# EAGLE board Casa Inteligente (EAGLE 9.7.0)

Size 393.65 x 179.97 mm. Coordinates in mm from the lower left corner, seen from the top.
Outline: 0,0 393.65,0 393.65,179.97 0,179.97 0,0
Copper layers (1*16): Top 0.035mm / dielectric 1.5mm / Bottom 0.035mm
Design rules "default": minimum track width 6mil, minimum drill 0.35mm, track to track 6mil, track to pad 6mil, pad to pad 6mil, via to via 6mil, smd to smd 6mil, copper to edge 40mil, drill to drill 6mil, minimum pad ring 10mil, minimum via ring 8mil, stop-mask expansion 4mil, vias tented up to drill 0mil, thermal gap 10mil

## Footprints (pad centres in the part's own frame; a part is rotated, then mirrored left to right if it is on the bottom)
LEDRD254W60D565H860B_Y = drill 0.981 pad 1.581: 1 -1.27,0; 2 1.27,0
MQ-XX-SOCKET = drill 1.27: 1 -6.223,6.223; 2 -8.788,0; 3 -6.223,-6.223; 4 6.223,-6.223; 5 8.788,0; 6 6.223,6.223
KS2E-M-DC5 = drill 0.8: 1 -8.89,-3.81; 4 -1.27,-3.81; 6 3.81,-3.81; 8 8.89,-3.81; 9 8.89,3.81; 11 3.81,3.81; 13 -1.27,3.81; 16 -8.89,3.81
1X02 = drill 1.016 long: 1 -1.27,0; 2 1.27,0
BATTERY-GENERIC = drill 1.118 pad 3.15 octagon: + 2.54,0; - -2.54,0
PIEZO = drill 1 pad 1.6: 1 -3.5,0; 2 3.5,0
28027 = drill 1.016 long: 1 -2.54,0; 2 0,0; 3 2.54,0
GL5528 = drill 0.8 pad 1.4: 1 -1.702,0; 2 1.702,0
RESAD1016W63L850D250B = drill 0.83 pad 1.43: 1 -5.08,0; 2 5.08,0
SEN-13322 = drill 1.016 long: 1 -2.54,0; 2 0,0; 3 2.54,0
ARDUINO-UNO-R3-SHIELD = drill 1.016 pad 1.88: 3.3V 24.13,-2.54; 5V 24.13,0; A0 24.13,12.7; A1 24.13,15.24; A2 24.13,17.78; A3 24.13,20.32; A4 24.13,22.86; A5 24.13,25.4; AREF -24.13,-13.97; D2 -24.13,20.32; D3 -24.13,17.78; D4 -24.13,15.24; D5 -24.13,12.7; D6 -24.13,10.16; D7 -24.13,7.62; D8 -24.13,3.81; D9 -24.13,1.27; D10 -24.13,-1.27; D11 -24.13,-3.81; D12 -24.13,-6.35; D13 -24.13,-8.89; GND@0 24.13,2.54; GND@1 24.13,5.08; GND@2 -24.13,-11.43; IOREF 24.13,-7.62; NC 24.13,-10.16; RES 24.13,-5.08; RX -24.13,25.4; SCL -24.13,-19.05; SDA -24.13,-16.51; TX -24.13,22.86; VIN 24.13,7.62
TO92 = drill 0.813 octagon: 1 -1.27,0; 2 0,1.905; 3 1.27,0

## Placement (x,y rotation side)
DLED_AMARELO  YELLOW  [LEDRD254W60D565H860B_Y]  204.03,124.81 180 top
DLED_AMARELO1  YELLOW  [LEDRD254W60D565H860B_Y]  212.34,124.92 180 top
DLED_AMARELO2  YELLOW  [LEDRD254W60D565H860B_Y]  220.7,124.87 180 top
DLED_AMARELO3  YELLOW  [LEDRD254W60D565H860B_Y]  263.98,124.91 180 top
DLED_AMARELO4  YELLOW  [LEDRD254W60D565H860B_Y]  273.54,125.14 180 top
DLED_AMARELO5  YELLOW  [LEDRD254W60D565H860B_Y]  282.89,125.04 180 top
GASSENSOR_DE_GÁS  GAS-SENSORMQ-XX-SOCKET  [MQ-XX-SOCKET]  325.07,12.92 270 top
KRELE_AQUECEDOR  RELAY-DPDT_KS2E  [KS2E-M-DC5]  380.42,123.6 0 top
KRELE_BOMBA_D'_ÁGUA  RELAY-DPDT_KS2E  [KS2E-M-DC5]  153.5,122.68 0 top
LAQUECEDOR  LIGHTBULB  [1X02]  380.88,136.7 0 top
LBOMBA_D'_ÁGUA  LIGHTBULB  [1X02]  154.11,136.01 0 top
PFONTE_DC_/_12V_0.250A  BATTERYGENERIC  [BATTERY-GENERIC]  153.91,168.96 180 top
PFONTE_DC_/_12V_0.250A1  BATTERYGENERIC  [BATTERY-GENERIC]  380.24,171.71 180 top
PIEZOBUZZER  PIEZO  [PIEZO]  326.17,113.96 0 top
PIRSENSOR_DE_MOVIMENTO  PIR-SENSOR_28027  [28027]  271.25,12.77 180 top
RLDR  PHOTOCELL_GL5528  [GL5528]  210.79,9.18 180 top
RRESISTOR_4K_OHM  4k  [RESAD1016W63L850D250B]  212.14,22.16 90 top
RRESISTOR_100K_OHM  100k  [RESAD1016W63L850D250B]  319.82,108.88 90 top
RRESISTOR_220_OHM  220  [RESAD1016W63L850D250B]  284.16,119.96 90 top
RRESISTOR_220_OHM1  220  [RESAD1016W63L850D250B]  274.81,120.06 90 top
RRESISTOR_220_OHM2  220  [RESAD1016W63L850D250B]  265.25,119.83 90 top
RRESISTOR_220_OHM3  220  [RESAD1016W63L850D250B]  221.97,119.79 90 top
RRESISTOR_220_OHM4  220  [RESAD1016W63L850D250B]  213.61,119.84 90 top
RRESISTOR_220_OHM5  220  [RESAD1016W63L850D250B]  205.3,119.73 90 top
RRESISTOR_800_OHM  800  [RESAD1016W63L850D250B]  319.99,29.43 270 top
SENSENSOR_DE_UMIDADE_DO_SOLO  SEN-13322  [SEN-13322]  152.71,26.47 0 top
U1  ARDUINO-UNO-R3-SHIELD  [ARDUINO-UNO-R3-SHIELD]  29.84,99.93 180 top
USENSOR_DE_TEMPERATURA  TMP36GT9Z_TO92  [TO92]  380.15,14.33 0 top

## Library data of the parts
DLED_AMARELO DLED_AMARELO1-DLED_AMARELO5 = Tinkercad; CATEGORY: Opto-Electronic; SUB-CATEGORY: LED; VALUE: LED_YELLOW
GASSENSOR_DE_GÁS KRELE_AQUECEDOR KRELE_BOMBA_D'_ÁGUA LAQUECEDOR LBOMBA_D'_ÁGUA PFONTE_DC_/_12V_0.250A PFONTE_DC_/_12V_0.250A1 PIEZOBUZZER PIRSENSOR_DE_MOVIMENTO RLDR RRESISTOR_4K_OHM RRESISTOR_100K_OHM RRESISTOR_220_OHM RRESISTOR_220_OHM1-RRESISTOR_220_OHM5 RRESISTOR_800_OHM SENSENSOR_DE_UMIDADE_DO_SOLO U1 USENSOR_DE_TEMPERATURA = Tinkercad

## Nets
DLED_AMARELO1_A: DLED_AMARELO1.1 RRESISTOR_220_OHM4.2
DLED_AMARELO2_A: DLED_AMARELO2.1 RRESISTOR_220_OHM3.2
DLED_AMARELO3_A: DLED_AMARELO3.1 RRESISTOR_220_OHM2.2
DLED_AMARELO4_A: DLED_AMARELO4.1 RRESISTOR_220_OHM1.2
DLED_AMARELO5_A: DLED_AMARELO5.1 RRESISTOR_220_OHM.2
DLED_AMARELO_A: DLED_AMARELO.1 RRESISTOR_220_OHM5.2
LAQUECEDOR_1: KRELE_AQUECEDOR.9 LAQUECEDOR.1
LBOMBA_D'_ÁGUA_1: KRELE_BOMBA_D'_ÁGUA.9 LBOMBA_D'_ÁGUA.1
PFONTE_DC_/_12V_0.250A1+: KRELE_AQUECEDOR.13 PFONTE_DC_/_12V_0.250A1.+
PFONTE_DC_/_12V_0.250A1-: LAQUECEDOR.2 PFONTE_DC_/_12V_0.250A1.-
PFONTE_DC_/_12V_0.250A+: KRELE_BOMBA_D'_ÁGUA.13 PFONTE_DC_/_12V_0.250A.+
PFONTE_DC_/_12V_0.250A-: LBOMBA_D'_ÁGUA.2 PFONTE_DC_/_12V_0.250A.-
PIEZOBUZZER_1: PIEZOBUZZER.1 RRESISTOR_100K_OHM.2
U1_5V: GASSENSOR_DE_GÁS.4 GASSENSOR_DE_GÁS.5 GASSENSOR_DE_GÁS.6 PIRSENSOR_DE_MOVIMENTO.2 RLDR.2 SENSENSOR_DE_UMIDADE_DO_SOLO.1 U1.5V USENSOR_DE_TEMPERATURA.3
U1_A0: SENSENSOR_DE_UMIDADE_DO_SOLO.3 U1.A0
U1_A1: RLDR.1 RRESISTOR_4K_OHM.1 U1.A1
U1_A2: GASSENSOR_DE_GÁS.1 GASSENSOR_DE_GÁS.3 RRESISTOR_800_OHM.2 U1.A2
U1_A3: U1.A3 USENSOR_DE_TEMPERATURA.2
U1_D8: KRELE_AQUECEDOR.16 U1.D8
U1_D9: RRESISTOR_100K_OHM.1 U1.D9
U1_D10: PIRSENSOR_DE_MOVIMENTO.1 U1.D10
U1_D11: RRESISTOR_220_OHM1.1 RRESISTOR_220_OHM2.1 RRESISTOR_220_OHM.1 U1.D11
U1_D12: RRESISTOR_220_OHM3.1 RRESISTOR_220_OHM4.1 RRESISTOR_220_OHM5.1 U1.D12
U1_D13: KRELE_BOMBA_D'_ÁGUA.16 U1.D13
U1_GND: DLED_AMARELO1.2 DLED_AMARELO2.2 DLED_AMARELO3.2 DLED_AMARELO4.2 DLED_AMARELO5.2 DLED_AMARELO.2 GASSENSOR_DE_GÁS.2 KRELE_AQUECEDOR.1 KRELE_BOMBA_D'_ÁGUA.1 PIEZOBUZZER.2 PIRSENSOR_DE_MOVIMENTO.3 RRESISTOR_4K_OHM.2 RRESISTOR_800_OHM.1 SENSENSOR_DE_UMIDADE_DO_SOLO.2 U1.GND@0 U1.GND@1 U1.GND@2 USENSOR_DE_TEMPERATURA.1

## Tracks (layer width: path | path; a pad name or v marks a point on that pad's centre or on a via)
DLED_AMARELO1_A  (1 unrouted)
DLED_AMARELO2_A  (1 unrouted)
DLED_AMARELO3_A  (1 unrouted)
DLED_AMARELO4_A  (1 unrouted)
DLED_AMARELO5_A  (1 unrouted)
DLED_AMARELO_A  (1 unrouted)
LAQUECEDOR_1  (1 unrouted)
LBOMBA_D'_ÁGUA_1  (1 unrouted)
PFONTE_DC_/_12V_0.250A1+  (1 unrouted)
PFONTE_DC_/_12V_0.250A1-  (1 unrouted)
PFONTE_DC_/_12V_0.250A+  (1 unrouted)
PFONTE_DC_/_12V_0.250A-  (1 unrouted)
PIEZOBUZZER_1  (1 unrouted)
U1_5V  (7 unrouted)
U1_A0  (1 unrouted)
U1_A1  (2 unrouted)
U1_A2  (3 unrouted)
U1_A3  (1 unrouted)
U1_D8  (1 unrouted)
U1_D9  (1 unrouted)
U1_D10  (1 unrouted)
U1_D11  (3 unrouted)
U1_D12  (3 unrouted)
U1_D13  (1 unrouted)
U1_GND  (17 unrouted)